# EAGLE board Circuit Diagram (EAGLE 9.6.2)
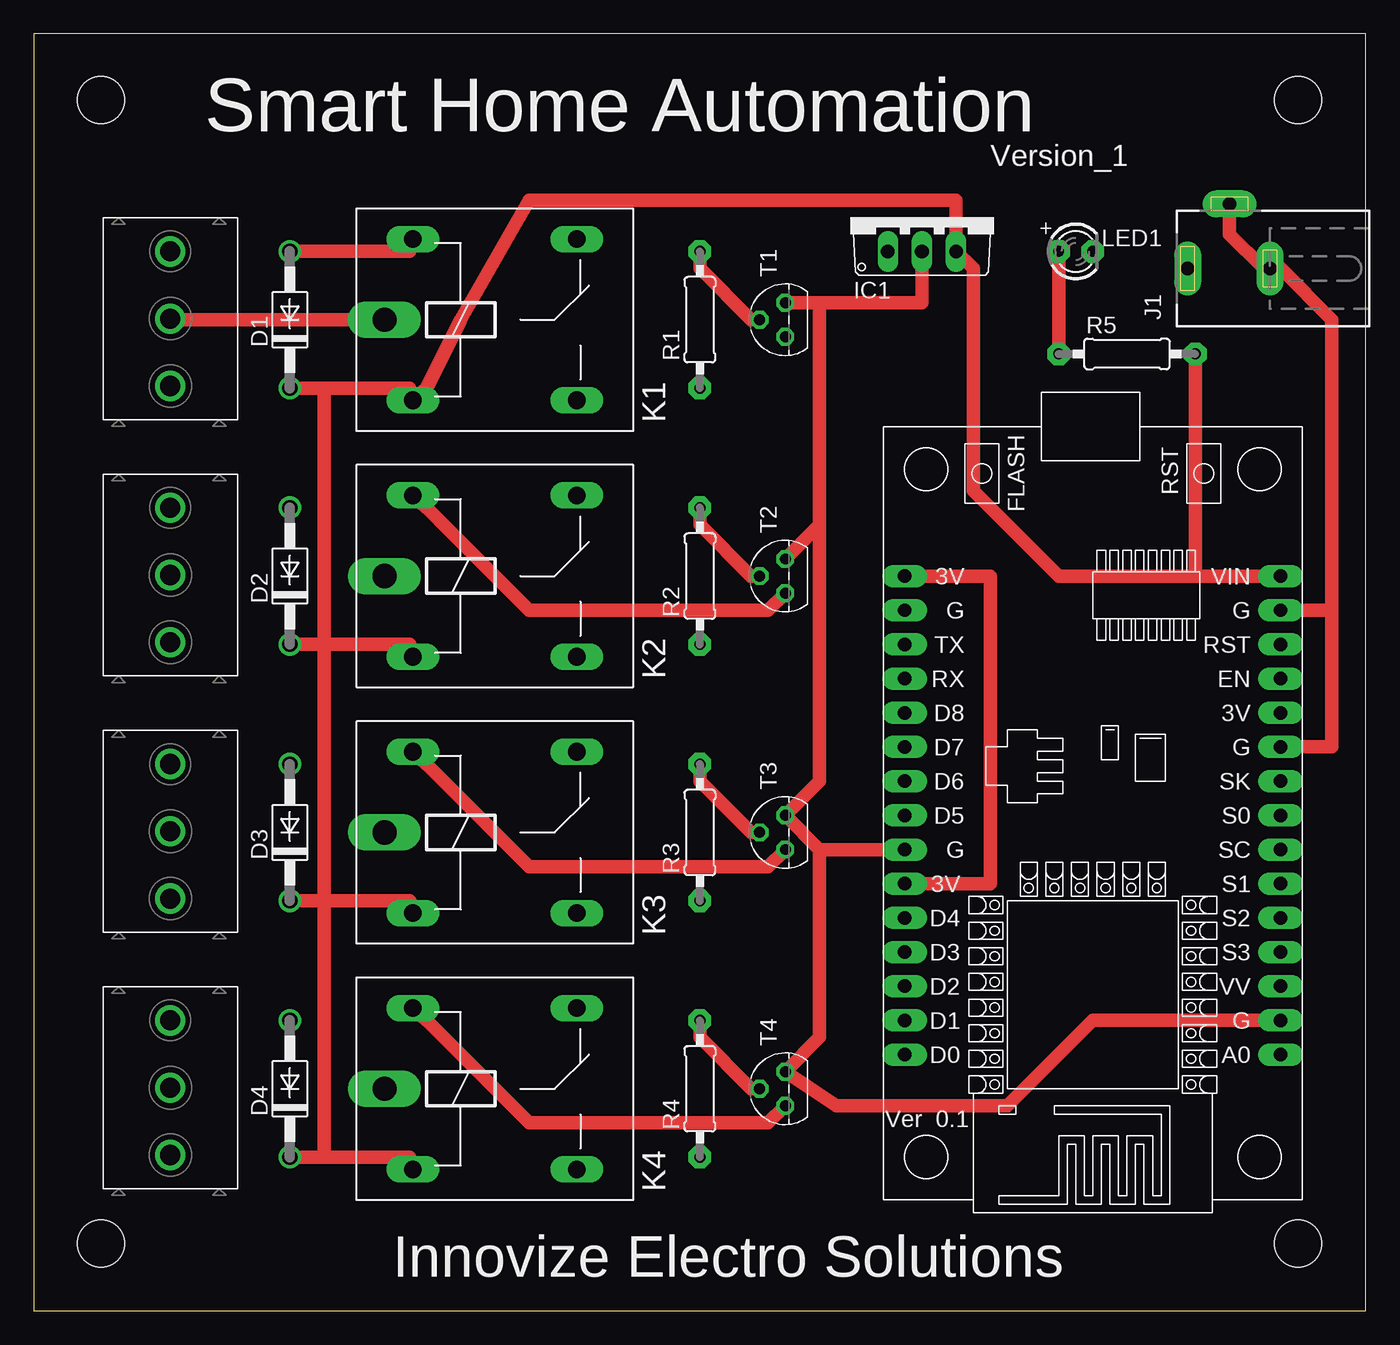
[diagram p0: board, top side]
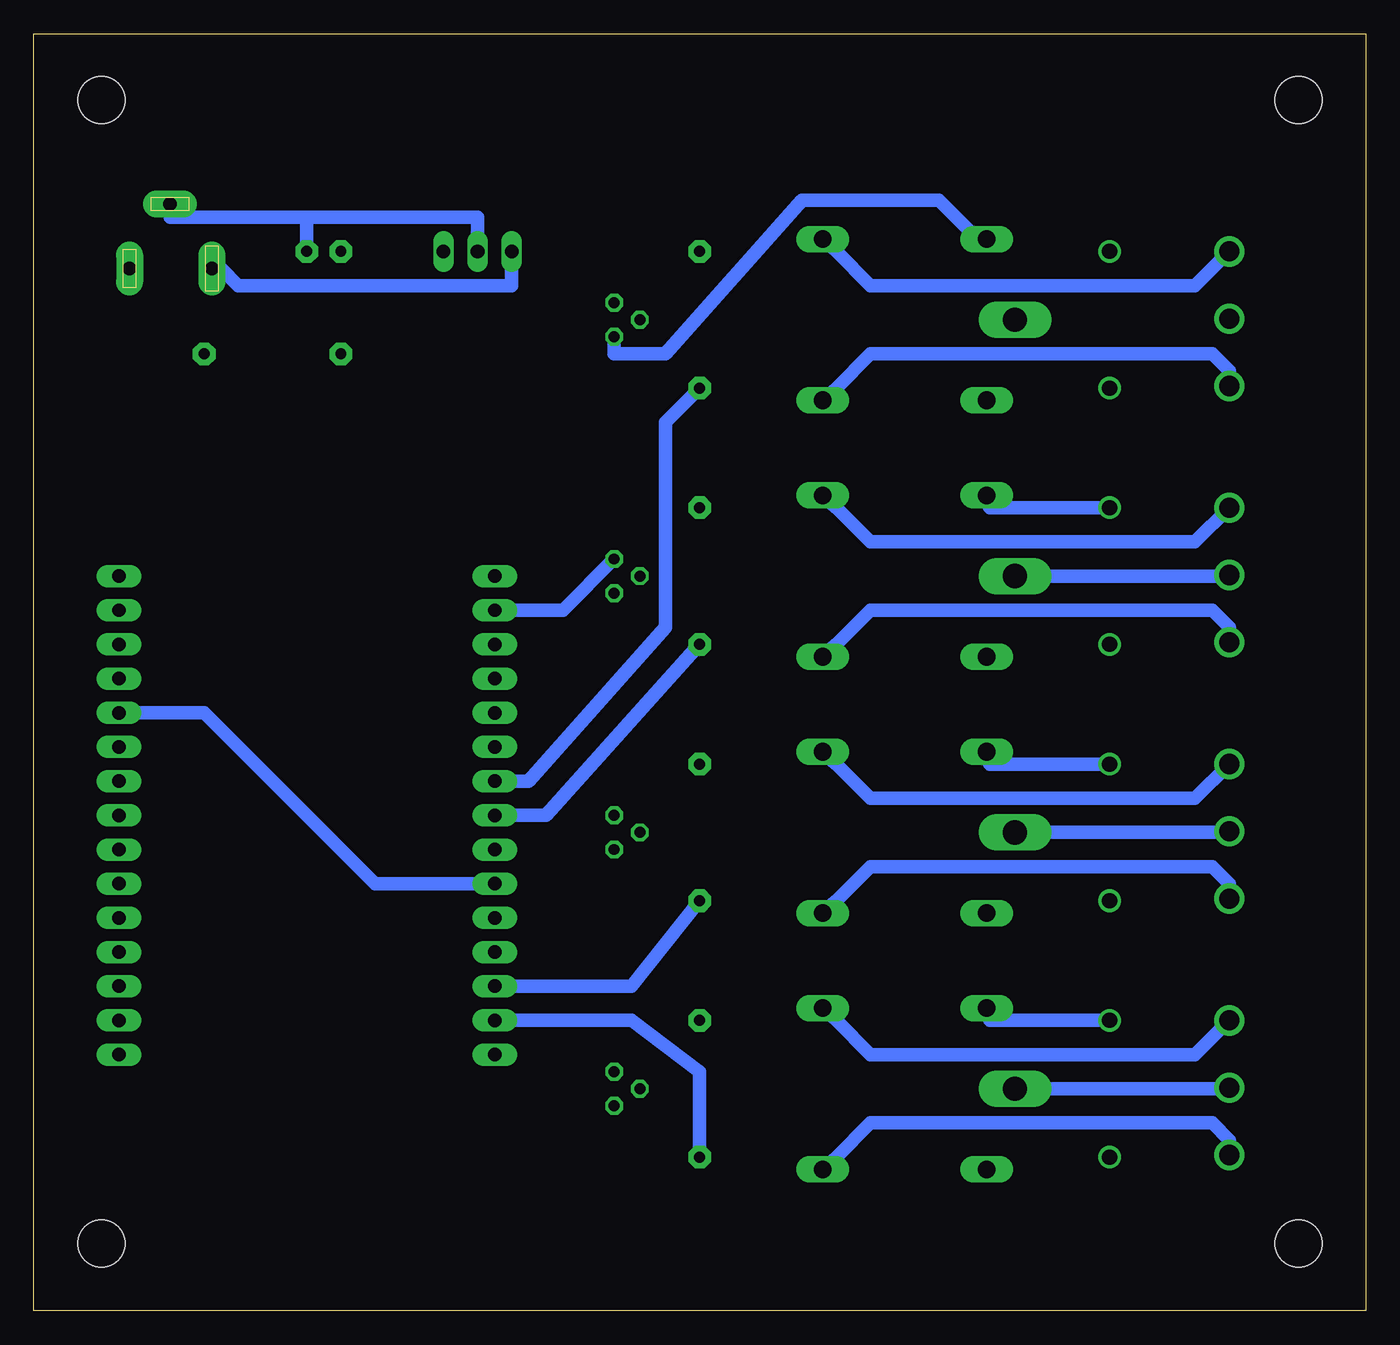
[diagram p1: board, bottom side, seen from below]

Size 99.04 x 94.92 mm. Coordinates in mm from the lower left corner, seen from the top.
Outline: 0,0 99.04,0 99.04,94.92 0,94.92 0,0
Copper layers (1*16): Top 0.035mm / dielectric 1.5mm / Bottom 0.035mm
Design rules "default *": minimum track width 1mm, minimum drill 24mil, track to track 8mil, track to pad 8mil, pad to pad 8mil, via to via 8mil, smd to smd 8mil, copper to edge 40mil, drill to drill 8mil, minimum pad ring 10mil, minimum via ring 8mil, stop-mask expansion 4mil, vias tented up to drill 0mil, thermal gap 10mil
Holes 3.5 mm at 5,90 94,90 94,5 5,5

## Footprints (pad centres in the part's own frame; a part is rotated, then mirrored left to right if it is on the bottom)
DO41-10 = drill 1.118: A 5.08,0; C -5.08,0
TO220V = drill 1.016 long: 1 -2.54,-2.54; 2 0,-2.54; 3 2.54,-2.54
DCJ0202 = drill 1 pad 2 long: 1 0,3.1; 2 4.8,0; 3 0,-3
ZF112 = drill 1.321 long: 1 -6.096,5.994; 2 -6.096,-5.994; O 6.096,5.994; S 6.096,-5.994 | drill 1.803 long: P -8.204,0
LED3MM = drill 0.813 pad 1.676 octagon: A -1.27,0; K 1.27,0
0207/10 = drill 0.813 pad 1.676 octagon: 1 -5.08,0; 2 5.08,0
TO92 = drill 0.813 octagon: 1 1.27,0; 2 0,1.905; 3 -1.27,0
EK500V-03P = drill 1.5: P$1 0,0; P$2 5,0; P$3 10,0
NODEMCU = drill 1 pad 1.676 long: 1 -13.97,17.78; 2 -13.97,15.24; 3 -13.97,12.7; 4 -13.97,10.16; 5 -13.97,7.62; 6 -13.97,5.08; 7 -13.97,2.54; 8 -13.97,0; 9 -13.97,-2.54; 10 -13.97,-5.08; 11 -13.97,-7.62; 12 -13.97,-10.16; 13 -13.97,-12.7; 14 -13.97,-15.24; 15 -13.97,-17.78; 16 13.97,-17.78; 17 13.97,-15.24; 18 13.97,-12.7; 19 13.97,-10.16; 20 13.97,-7.62; 21 13.97,-5.08; 22 13.97,-2.54; 23 13.97,0; 24 13.97,2.54; 25 13.97,5.08; 26 13.97,7.62; 27 13.97,10.16; 28 13.97,12.7; 29 13.97,15.24; 30 13.97,17.78

## Placement (x,y rotation side)
D1  1N4007  [DO41-10]  19.05,73.66 90 top
D2  1N4007  [DO41-10]  19.05,54.61 90 top
D3  1N4007  [DO41-10]  19.05,35.56 90 top
D4  1N4007  [DO41-10]  19.05,16.51 90 top
IC1  Regulator 7805  [TO220V]  66.04,81.28 0 top
J1  DC_12V  [DCJ0202]  88.9,77.47 90 top
K1  [ZF112]  34.29,73.66 0 top
K2  [ZF112]  34.29,54.61 0 top
K3  [ZF112]  34.29,35.56 0 top
K4  [ZF112]  34.29,16.51 0 top
LED1  [LED3MM]  77.47,78.74 0 top
R1  [0207/10]  49.53,73.66 90 top
R2  [0207/10]  49.53,54.61 90 top
R3  [0207/10]  49.53,35.56 90 top
R4  [0207/10]  49.53,16.51 90 top
R5  [0207/10]  81.28,71.12 0 top
T1  BC547  [TO92]  55.88,73.66 90 top
T2  BC547  [TO92]  55.88,54.61 90 top
T3  BC547  [TO92]  55.88,35.56 90 top
T4  BC547  [TO92]  55.88,16.51 90 top
TB_1  ST03-5MM  [EK500V-03P]  10.16,78.74 270 top
TB_2  ST03-5MM  [EK500V-03P]  10.16,59.69 270 top
TB_3  ST03-5MM  [EK500V-03P]  10.16,40.64 270 top
TB_4  ST03-5MM  [EK500V-03P]  10.16,21.59 270 top
U$1  NODEMCU  [NODEMCU]  78.74,36.83 180 top

## Library data of the parts
D1-D4 = diode
IC1 = linear
J1 = con-jack
K1-K4 = relay; OC_FARNELL: unknown; OC_NEWARK: unknown
LED1 R1-R5 = adafruit
T1-T4 = transistor
TB_1-TB_4 = con-dinkle
U$1 = nodemcu

## Nets
3V: U$1.11 U$1.16 U$1.25
D1: R4.1 U$1.29
D2: R3.1 U$1.28
D5: R2.1 U$1.23
D6: R1.1 U$1.22
GND: IC1.2 J1.2 J1.3 LED1.K T1.1 T2.1 T3.1 T4.1 U$1.2 U$1.10 U$1.14 U$1.17 U$1.24
N$1: R1.2 T1.2
N$2: D1.A K1.1 T1.3
N$3: R3.2 T3.2
N$4: K1.P TB_1.P$2
N$5: K1.S TB_1.P$3
N$6: K1.O TB_1.P$1
N$7: R2.2 T2.2
N$8: D2.A K2.1 T2.3
N$9: LED1.A R5.1
N$10: K2.P TB_2.P$2
N$11: K2.S TB_2.P$3
N$12: K2.O TB_2.P$1
N$13: D3.A K3.1 T3.3
N$15: K3.P TB_3.P$2
N$16: K3.S TB_3.P$3
N$17: K3.O TB_3.P$1
N$18: R4.2 T4.2
N$19: D4.A K4.1 T4.3
N$20: D1.C D2.C D3.C D4.C IC1.3 K1.2 K2.2 K3.2 K4.2 R5.2 U$1.15
N$21: K4.P TB_4.P$2
N$22: K4.S TB_4.P$3
N$23: K4.O TB_4.P$1
VCC: IC1.1 J1.1

## Tracks (layer width: path | path; a pad name or v marks a point on that pad's centre or on a via)
3V
  Top 1: U$1.16 71.12,54.61 71.12,31.75 U$1.25
  Bottom 1: U$1.25 73.66,31.75 86.36,44.45 U$1.11
D1
  Bottom 1: R4.1 49.53,17.78 54.61,21.59 U$1.29
D2
  Bottom 1: R3.1 54.61,24.13 U$1.28
D5
  Bottom 1: R2.1 60.96,36.83 U$1.23
D6
  Bottom 1: U$1.22 62.23,39.37 52.07,50.8 52.07,66.04 R1.1
GND
  Top 1: 58.42,34.29 58.42,20.32 T4.1 59.69,15.24 72.39,15.24 78.74,21.59 U$1.2 | 58.42,34.29 T3.1 58.42,39.37 58.42,58.42 | 58.42,34.29 U$1.24 | 58.42,74.93 66.04,74.93 IC1.2 | 58.42,74.93 T1.1 | 58.42,58.42 T2.1 | 58.42,74.93 58.42,58.42 | J1.2 88.9,80.01 91.44,77.47 J1.3 92.71,77.47 96.52,73.66 96.52,52.07 | U$1.10 96.52,41.91 96.52,52.07 | U$1.14 96.52,52.07
  Bottom 1: T2.1 59.69,52.07 U$1.17 | IC1.2 66.04,81.28 78.74,81.28 | 78.74,81.28 88.9,81.28 J1.2 | 78.74,81.28 LED1.K
N$1
  Top 1: R1.2 49.53,77.47 53.34,73.66 T1.2
N$2
  Top 1: D1.A 27.94,78.74 K1.1
  Bottom 1: T1.3 55.88,71.12 52.07,71.12 41.91,82.55 31.75,82.55 29.21,80.01 K1.1
N$3
  Top 1: R3.2 49.53,39.37 53.34,35.56 T3.2
N$4
  Top 1: K1.P 10.16,73.66 TB_1.P$2
N$5
  Bottom 1: K1.S 39.37,68.58 36.83,71.12 11.43,71.12 10.16,69.85 TB_1.P$3
N$6
  Bottom 1: TB_1.P$1 12.7,76.2 36.83,76.2 39.37,78.74 K1.O
N$7
  Top 1: R2.2 49.53,58.42 53.34,54.61 T2.2
N$8
  Top 1: T2.3 54.61,52.07 36.83,52.07 29.21,59.69 K2.1
  Bottom 1: D2.A 27.94,59.69 K2.1
N$9
  Top 1: LED1.A R5.1
N$10
  Bottom 1: K2.P 10.16,54.61 TB_2.P$2
N$11
  Bottom 1: K2.S 39.37,49.53 36.83,52.07 11.43,52.07 10.16,50.8 TB_2.P$3
N$12
  Bottom 1: TB_2.P$1 12.7,57.15 36.83,57.15 39.37,59.69 K2.O
N$13
  Top 1: T3.3 54.61,33.02 36.83,33.02 29.21,40.64 K3.1
  Bottom 1: D3.A 27.94,40.64 K3.1
N$15
  Bottom 1: K3.P 10.16,35.56 TB_3.P$2
N$16
  Bottom 1: K3.S 39.37,30.48 36.83,33.02 11.43,33.02 10.16,31.75 TB_3.P$3
N$17
  Bottom 1: TB_3.P$1 12.7,38.1 36.83,38.1 39.37,40.64 K3.O
N$18
  Top 1: R4.2 49.53,20.32 53.34,16.51 T4.2
N$19
  Top 1: T4.3 54.61,13.97 36.83,13.97 29.21,21.59 K4.1
  Bottom 1: D4.A 27.94,21.59 K4.1
N$20
  Top 1: U$1.15 86.36,54.61 | 86.36,54.61 76.2,54.61 69.85,60.96 69.85,77.47 IC1.3 68.58,82.55 36.83,82.55 31.75,73.66 29.21,68.58 K1.2 27.94,68.58 21.59,68.58 | 21.59,11.43 27.94,11.43 K4.2 | 21.59,11.43 D4.C | 21.59,30.48 27.94,30.48 K3.2 | 21.59,30.48 D3.C | 21.59,30.48 21.59,11.43 | 21.59,49.53 27.94,49.53 K2.2 | 21.59,49.53 D2.C | 21.59,68.58 D1.C | 21.59,68.58 21.59,49.53 | 21.59,49.53 21.59,30.48 | 86.36,54.61 R5.2
N$21
  Bottom 1: K4.P 10.16,16.51 TB_4.P$2
N$22
  Bottom 1: K4.S 39.37,11.43 36.83,13.97 11.43,13.97 10.16,12.7 TB_4.P$3
N$23
  Bottom 1: TB_4.P$1 12.7,19.05 36.83,19.05 39.37,21.59 K4.O
VCC
  Bottom 1: IC1.1 63.5,76.2 83.82,76.2 85.09,77.47 J1.1

## Text on the board
tNames: Smart Home Automation | Version_1 | Innovize Electro Solutions